# EAGLE board BigBus (EAGLE 7.7.0)
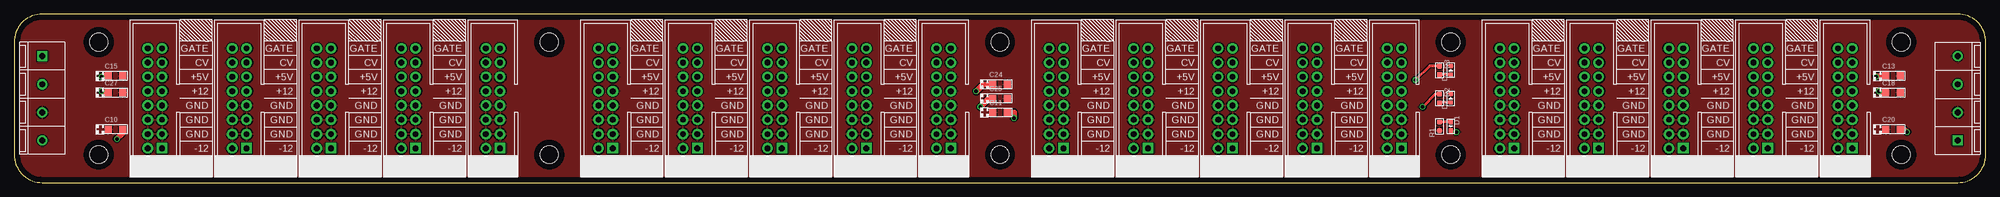
[diagram p0: board, top side]
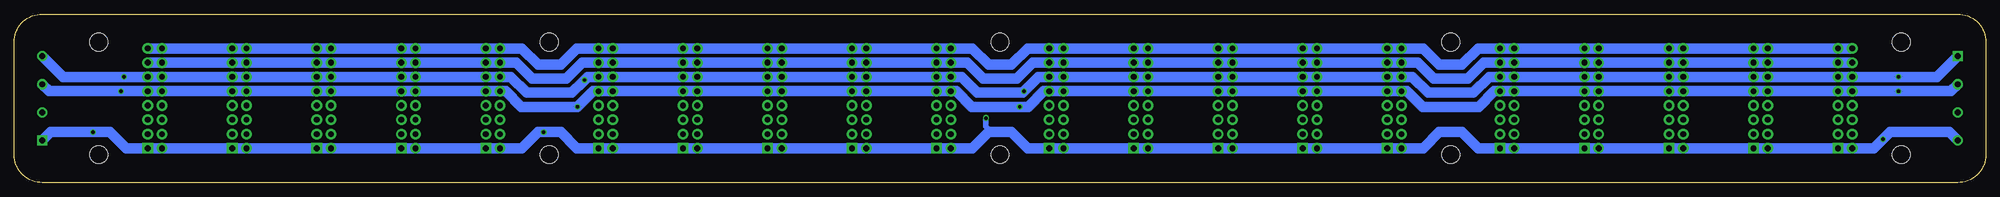
[diagram p1: board, bottom side, seen from below]

Size 350 x 30 mm. Coordinates in mm from the lower left corner, seen from the top.
Outline: 0,25 0,5 arc90 5,0 345,0 arc90 350,5 350,25 arc90 345,30 5,30 arc90 0,25
Copper layers (1*16): Top 0.035mm / dielectric 1.5mm / Bottom 0.035mm
Design rules "default": minimum track width 10mil, minimum drill 24mil, track to track 8mil, track to pad 8mil, pad to pad 8mil, via to via 8mil, smd to smd 8mil, copper to edge 40mil, drill to drill 8mil, minimum pad ring 10mil, minimum via ring 8mil, stop-mask expansion 4mil, vias tented up to drill 0mil, thermal gap 10mil
Net classes: 0 default: width 1 mm

## Footprints (pad centres in the part's own frame; a part is rotated, then mirrored left to right if it is on the bottom)
AVX-A = smd 1.27 x 1.27: + -1.27,0; - 1.27,0
LED0603 = smd 0.762 x 0.889: + -0.762,0; - 0.762,0
3.2-NOMARKINGS-SMALLSAFEZONE = hole 3.2: 0,0
R0603 = smd 0.889 x 0.889: 1 -0.762,0; 2 0.762,0
POWER_16_SHROUDED = drill 1.016 pad 1.88 square: 1 -8.89,-1.27 | drill 1.016 pad 1.88: 2 -8.89,1.27; 3 -6.35,-1.27; 4 -6.35,1.27; 5 -3.81,-1.27; 6 -3.81,1.27; 7 -1.27,-1.27; 8 -1.27,1.27; 9 1.27,-1.27; 10 1.27,1.27; 11 3.81,-1.27; 12 3.81,1.27; 13 6.35,-1.27; 14 6.35,1.27; 15 8.89,-1.27; 16 8.89,1.27
POWER_16_SHROUDED_NOTEXT = drill 1.016 pad 1.88 square: 1 -8.89,-1.27 | drill 1.016 pad 1.88: 2 -8.89,1.27; 3 -6.35,-1.27; 4 -6.35,1.27; 5 -3.81,-1.27; 6 -3.81,1.27; 7 -1.27,-1.27; 8 -1.27,1.27; 9 1.27,-1.27; 10 1.27,1.27; 11 3.81,-1.27; 12 3.81,1.27; 13 6.35,-1.27; 14 6.35,1.27; 15 8.89,-1.27; 16 8.89,1.27
4PIN5MM = drill 1.016 pad 1.778 square: 1 -7.5,0 | drill 1.016 pad 1.778: 2 -2.5,0; 3 2.5,0; 4 7.5,0

## Placement (x,y rotation side)
C10  10u  [AVX-A]  18,9.5 0 top
C11  10u  [AVX-A]  175,12.5 0 top
C13  10u  [AVX-A]  333.5,19 0 top
C15  10u  [AVX-A]  18,19 0 top
C18  10u  [AVX-A]  333.5,16 0 top
C20  10u  [AVX-A]  333.5,9.5 0 top
C24  10u  [AVX-A]  175,17.5 0 top
C25  10u  [AVX-A]  175,15 0 top
C27  10u  [AVX-A]  18,16 0 top
D1  yellow  [LED0603]  255,10 270 top
D2  yellow  [LED0603]  255,15 90 top
D3  yellow  [LED0603]  255,20 90 top
H1  MOUNT-HOLE  [3.2-NOMARKINGS-SMALLSAFEZONE]  15,5 0 top
H2  MOUNT-HOLE  [3.2-NOMARKINGS-SMALLSAFEZONE]  255,5 0 top
H3  MOUNT-HOLE  [3.2-NOMARKINGS-SMALLSAFEZONE]  15,25 0 top
H4  MOUNT-HOLE  [3.2-NOMARKINGS-SMALLSAFEZONE]  255,25 0 top
H5  MOUNT-HOLE  [3.2-NOMARKINGS-SMALLSAFEZONE]  175,25 0 top
H6  MOUNT-HOLE  [3.2-NOMARKINGS-SMALLSAFEZONE]  175,5 0 top
H7  MOUNT-HOLE  [3.2-NOMARKINGS-SMALLSAFEZONE]  95,25 0 top
H8  MOUNT-HOLE  [3.2-NOMARKINGS-SMALLSAFEZONE]  95,5 0 top
H9  MOUNT-HOLE  [3.2-NOMARKINGS-SMALLSAFEZONE]  335,25 0 top
H10  MOUNT-HOLE  [3.2-NOMARKINGS-SMALLSAFEZONE]  335,5 0 top
R1  680  [R0603]  253,10 90 top
R2  680  [R0603]  253,15 270 top
R3  220  [R0603]  253,20 270 top
U$1  POWERSHROUDED  [POWER_16_SHROUDED]  70,15 90 top
U$2  POWER_SHROUDED_NOTEXT  [POWER_16_SHROUDED_NOTEXT]  85,15 90 top
U$3  POWERSHROUDED  [POWER_16_SHROUDED]  105,15 90 top
U$4  POWERSHROUDED  [POWER_16_SHROUDED]  120,15 90 top
U$5  POWERSHROUDED  [POWER_16_SHROUDED]  135,15 90 top
U$6  POWERSHROUDED  [POWER_16_SHROUDED]  55,15 90 top
U$7  POWER_SHROUDED_NOTEXT  [POWER_16_SHROUDED_NOTEXT]  165,15 90 top
U$8  POWERSHROUDED  [POWER_16_SHROUDED]  40,15 90 top
U$9  POWERSHROUDED  [POWER_16_SHROUDED]  25,15 90 top
U$10  POWERSHROUDED  [POWER_16_SHROUDED]  185,15 90 top
U$11  POWERSHROUDED  [POWER_16_SHROUDED]  150,15 90 top
U$12  POWERSHROUDED  [POWER_16_SHROUDED]  295,15 90 top
U$13  POWERSHROUDED  [POWER_16_SHROUDED]  200,15 90 top
U$14  POWERSHROUDED  [POWER_16_SHROUDED]  280,15 90 top
U$15  POWERSHROUDED  [POWER_16_SHROUDED]  215,15 90 top
U$16  POWERSHROUDED  [POWER_16_SHROUDED]  265,15 90 top
U$17  POWERSHROUDED  [POWER_16_SHROUDED]  230,15 90 top
U$18  POWER_SHROUDED_NOTEXT  [POWER_16_SHROUDED_NOTEXT]  245,15 90 top
U$19  4PIN5MM  [4PIN5MM]  345,15 90 top
U$20  POWERSHROUDED  [POWER_16_SHROUDED]  310,15 90 top
U$21  POWER_SHROUDED_NOTEXT  [POWER_16_SHROUDED_NOTEXT]  325,15 90 top
U$22  4PIN5MM  [4PIN5MM]  5,15 270 top

## Library data of the parts
C10 C11 C13 C15 C18 C20 C24 C25 C27 U$1-U$22 = EurorackModularParts
D1-D3 R1-R3 = OPL
H1-H10 = zephod-components

## Nets
+5: C13.+ C15.+ C24.+ R3.1 U$1.11 U$1.12 U$2.11 U$2.12 U$3.11 U$3.12 U$4.11 U$4.12 U$5.11 U$5.12 U$6.11 U$6.12 U$7.11 U$7.12 U$8.11 U$8.12 U$9.11 U$9.12 U$10.11 U$10.12 U$11.11 U$11.12 U$12.11 U$12.12 U$13.11 U$13.12 U$14.11 U$14.12 U$15.11 U$15.12 U$16.11 U$16.12 U$17.11 U$17.12 U$18.11 U$18.12 U$19.4 U$20.11 U$20.12 U$21.11 U$21.12 U$22.1
+12: C18.+ C25.+ C27.+ R2.1 U$1.9 U$1.10 U$2.9 U$2.10 U$3.9 U$3.10 U$4.9 U$4.10 U$5.9 U$5.10 U$6.9 U$6.10 U$7.9 U$7.10 U$8.9 U$8.10 U$9.9 U$9.10 U$10.9 U$10.10 U$11.9 U$11.10 U$12.9 U$12.10 U$13.9 U$13.10 U$14.9 U$14.10 U$15.9 U$15.10 U$16.9 U$16.10 U$17.9 U$17.10 U$18.9 U$18.10 U$19.3 U$20.9 U$20.10 U$21.9 U$21.10 U$22.2
-12: C10.- C11.- C20.- D1.- U$1.1 U$1.2 U$2.1 U$2.2 U$3.1 U$3.2 U$4.1 U$4.2 U$5.1 U$5.2 U$6.1 U$6.2 U$7.1 U$7.2 U$8.1 U$8.2 U$9.1 U$9.2 U$10.1 U$10.2 U$11.1 U$11.2 U$12.1 U$12.2 U$13.1 U$13.2 U$14.1 U$14.2 U$15.1 U$15.2 U$16.1 U$16.2 U$17.1 U$17.2 U$18.1 U$18.2 U$19.1 U$20.1 U$20.2 U$21.1 U$21.2 U$22.4
CV: U$1.13 U$1.14 U$2.13 U$2.14 U$3.13 U$3.14 U$4.13 U$4.14 U$5.13 U$5.14 U$6.13 U$6.14 U$7.13 U$7.14 U$8.13 U$8.14 U$9.13 U$9.14 U$10.13 U$10.14 U$11.13 U$11.14 U$12.13 U$12.14 U$13.13 U$13.14 U$14.13 U$14.14 U$15.13 U$15.14 U$16.13 U$16.14 U$17.13 U$17.14 U$18.13 U$18.14 U$20.13 U$20.14 U$21.13 U$21.14
GATE: U$1.15 U$1.16 U$2.15 U$2.16 U$3.15 U$3.16 U$4.15 U$4.16 U$5.15 U$5.16 U$6.15 U$6.16 U$7.15 U$7.16 U$8.15 U$8.16 U$9.15 U$9.16 U$10.15 U$10.16 U$11.15 U$11.16 U$12.15 U$12.16 U$13.15 U$13.16 U$14.15 U$14.16 U$15.15 U$15.16 U$16.15 U$16.16 U$17.15 U$17.16 U$18.15 U$18.16 U$20.15 U$20.16 U$21.15 U$21.16
GND: C10.+ C11.+ C13.- C15.- C18.- C20.+ C24.- C25.- C27.- D2.- D3.- R1.1 U$1.3 U$1.4 U$1.5 U$1.6 U$1.7 U$1.8 U$2.3 U$2.4 U$2.5 U$2.6 U$2.7 U$2.8 U$3.3 U$3.4 U$3.5 U$3.6 U$3.7 U$3.8 U$4.3 U$4.4 U$4.5 U$4.6 U$4.7 U$4.8 U$5.3 U$5.4 U$5.5 U$5.6 U$5.7 U$5.8 U$6.3 U$6.4 U$6.5 U$6.6 U$6.7 U$6.8 U$7.3 U$7.4 U$7.5 U$7.6 U$7.7 U$7.8 U$8.3 U$8.4 U$8.5 U$8.6 U$8.7 U$8.8 U$9.3 U$9.4 U$9.5 U$9.6 U$9.7 U$9.8 U$10.3 U$10.4 U$10.5 U$10.6 U$10.7 U$10.8 U$11.3 U$11.4 U$11.5 U$11.6 U$11.7 U$11.8 U$12.3 U$12.4 U$12.5 U$12.6 U$12.7 U$12.8 U$13.3 U$13.4 U$13.5 U$13.6 U$13.7 U$13.8 U$14.3 U$14.4 U$14.5 U$14.6 U$14.7 U$14.8 U$15.3 U$15.4 U$15.5 U$15.6 U$15.7 U$15.8 U$16.3 U$16.4 U$16.5 U$16.6 U$16.7 U$16.8 U$17.3 U$17.4 U$17.5 U$17.6 U$17.7 U$17.8 U$18.3 U$18.4 U$18.5 U$18.6 U$18.7 U$18.8 U$19.2 U$20.3 U$20.4 U$20.5 U$20.6 U$20.7 U$20.8 U$21.3 U$21.4 U$21.5 U$21.6 U$21.7 U$21.8 U$22.3
N$1: D1.+ R1.2
N$2: D2.+ R2.2
N$3: D3.+ R3.2

## Tracks (layer width: path | path; a pad name or v marks a point on that pad's centre or on a via)
+5  (via drill 0.61)
  Top 0.5: R3.1 251.26,20.76 v248.75,18.25
  Top 1: C24.+ 172,17.5 v170.75,16.25 | C15.+ 15.69,19 v15.5,18.81 | C13.+ 330.69,19 v330.5,18.81
  Bottom 1.87: U$21.11 U$21.12 U$20.11 U$20.12 U$12.11 U$12.12 U$14.11 U$14.12 U$16.11 U$16.12 | U$18.11 U$18.12 U$17.11 U$17.12 U$15.11 U$15.12 U$13.11 U$13.12 U$10.11 U$10.12 | U$7.11 U$7.12 U$11.11 U$11.12 U$5.11 U$5.12 U$4.11 U$4.12 U$3.11 104.5,18.81 U$3.12 | U$9.12 U$9.11 U$8.12 U$8.11 U$6.12 U$6.11 U$1.12 U$1.11 U$2.12 U$2.11
  Bottom 1.88: U$2.11 88.19,18.81 91,16 99,16 101.81,18.81 104.5,18.81 | U$7.11 168.19,18.81 v170.75,16.25 171,16 179,16 181.81,18.81 U$10.12 | U$18.11 248.19,18.81 v248.75,18.25 249,18 251,16 259,16 261.81,18.81 U$16.12 | U$21.11 v330.5,18.81 341.31,18.81 U$19.4 | U$9.12 v15.5,18.81 8.69,18.81 U$22.1
+12  (via drill 0.61)
  Top 0.5: R2.1 252.26,15.76 v250,13.5
  Top 1: C25.+ 173,15 v171.5,13.5 | C27.+ 15.77,16 v15.5,16.27 | C18.+ 331.27,16 v331,16.27
  Bottom 1.87: U$21.9 U$21.10 U$20.9 U$20.10 U$12.9 U$12.10 U$14.9 U$14.10 U$16.9 U$16.10 | U$18.9 U$18.10 U$17.9 U$17.10 U$15.9 U$15.10 U$13.9 U$13.10 U$10.9 U$10.10 | U$7.9 U$7.10 U$11.9 U$11.10 U$5.9 U$5.10 U$4.9 U$4.10 U$3.9 U$3.10 | U$9.10 U$9.9 U$8.10 U$8.9 U$6.10 U$6.9 U$1.10 U$1.9 U$2.10 U$2.9
  Bottom 1.88: U$2.9 87.23,16.27 90,13.5 100,13.5 102.77,16.27 U$3.10 | U$7.9 167.23,16.27 170,13.5 v171.5,13.5 180,13.5 182.77,16.27 U$10.10 | U$18.9 247.23,16.27 249.5,14 v250,13.5 260,13.5 262.77,16.27 U$16.10 | U$21.9 v331,16.27 343.77,16.27 U$19.3 | U$9.10 v15.5,16.27 6.23,16.27 U$22.2
-12  (via drill 0.61)
  Top 0.5: D1.- 255.76,9.24 v256,9
  Top 1: C11.- 177.5,12.5 v177.5,11.5 | C10.- 19.27,8.77 v18.25,7.75 | C20.- 335.5,9.5 v336,9
  Bottom 1: v177.5,11.5 177.5,10 176.5,9
  Bottom 1.87: U$16.2 U$16.1 U$14.2 U$14.1 U$12.2 U$12.1 U$20.2 U$20.1 U$21.2 U$21.1 | U$18.1 U$18.2 U$17.1 U$17.2 U$15.1 U$15.2 U$13.1 U$13.2 U$10.1 U$10.2 | U$7.1 U$7.2 U$11.1 U$11.2 U$5.1 U$5.2 U$4.1 U$4.2 U$3.1 U$3.2 | U$2.1 U$2.2 U$1.1 U$1.2 U$6.1 U$6.2 U$8.1 U$8.2 U$9.1 U$9.2
  Bottom 1.88: U$2.1 90.11,6.11 93,9 97,9 99.89,6.11 U$3.2 | U$7.1 170.11,6.11 173,9 176.5,9 177,9 179.89,6.11 U$10.2 | U$18.1 250.11,6.11 253,9 v256,9 257,9 259.89,6.11 U$16.2 | U$21.1 330.11,6.11 333,9 v336,9 343.5,9 U$19.1 | U$9.2 19.89,6.11 v18.25,7.75 17,9 6.5,9 U$22.4
CV
  Bottom 1.87: U$9.14 U$9.13 U$8.14 U$8.13 U$6.14 U$6.13 U$1.14 U$1.13 U$2.14 U$2.13 | U$21.13 U$21.14 U$20.13 U$20.14 U$12.13 U$12.14 U$14.13 U$14.14 U$16.13 U$16.14 | U$18.13 U$18.14 U$17.13 U$17.14 U$15.13 U$15.14 U$13.13 U$13.14 U$10.13 U$10.14 | U$7.13 U$7.14 U$11.13 U$11.14 U$5.13 U$5.14 U$4.13 U$4.14 U$3.13 104.5,21.35 U$3.14
  Bottom 1.88: U$2.13 89.15,21.35 92,18.5 98,18.5 100.85,21.35 104.5,21.35 | U$7.13 169.15,21.35 172,18.5 178,18.5 180.85,21.35 U$10.14 | U$18.13 249.15,21.35 252,18.5 258,18.5 260.85,21.35 U$16.14
GATE
  Bottom 1.87: U$9.16 U$9.15 U$8.16 U$8.15 U$6.16 U$6.15 U$1.16 U$1.15 U$2.16 U$2.15 | U$7.15 U$7.16 U$11.15 U$11.16 U$5.15 U$5.16 U$4.15 U$4.16 U$3.15 U$3.16 | U$10.16 U$10.15 U$13.16 U$13.15 U$15.16 U$15.15 U$17.16 U$17.15 U$18.16 U$18.15 | U$16.16 264.5,23.89 U$16.15 U$14.16 U$14.15 U$12.16 U$12.15 U$20.16 U$20.15 U$21.16 U$21.15
  Bottom 1.88: U$2.15 90.11,23.89 93,21 97,21 99.89,23.89 U$3.16 | U$7.15 170.11,23.89 173,21 177,21 179.89,23.89 U$10.16 | U$18.15 250.11,23.89 253,21 257,21 259.89,23.89 264.5,23.89
GND
  pour Top: 0,30 345,30 arc-90 350,25 350,0 5,0 arc-90 0,5
N$1
  Top 0.5: D1.+ R1.2
N$2
  Top 0.5: D2.+ R2.2
N$3
  Top 0.5: D3.+ R3.2